# Altium PCB ArduinoUnoShield.PcbDoc
Units mm, origin at the board's own origin, x right, y up, seen from the top; angles counter-clockwise.
Board outline 68.58 x 53.34 mm, 2 copper layers (Top Layer, Bottom Layer); 22 components, 37 nets, 78 pads, 0 vias.
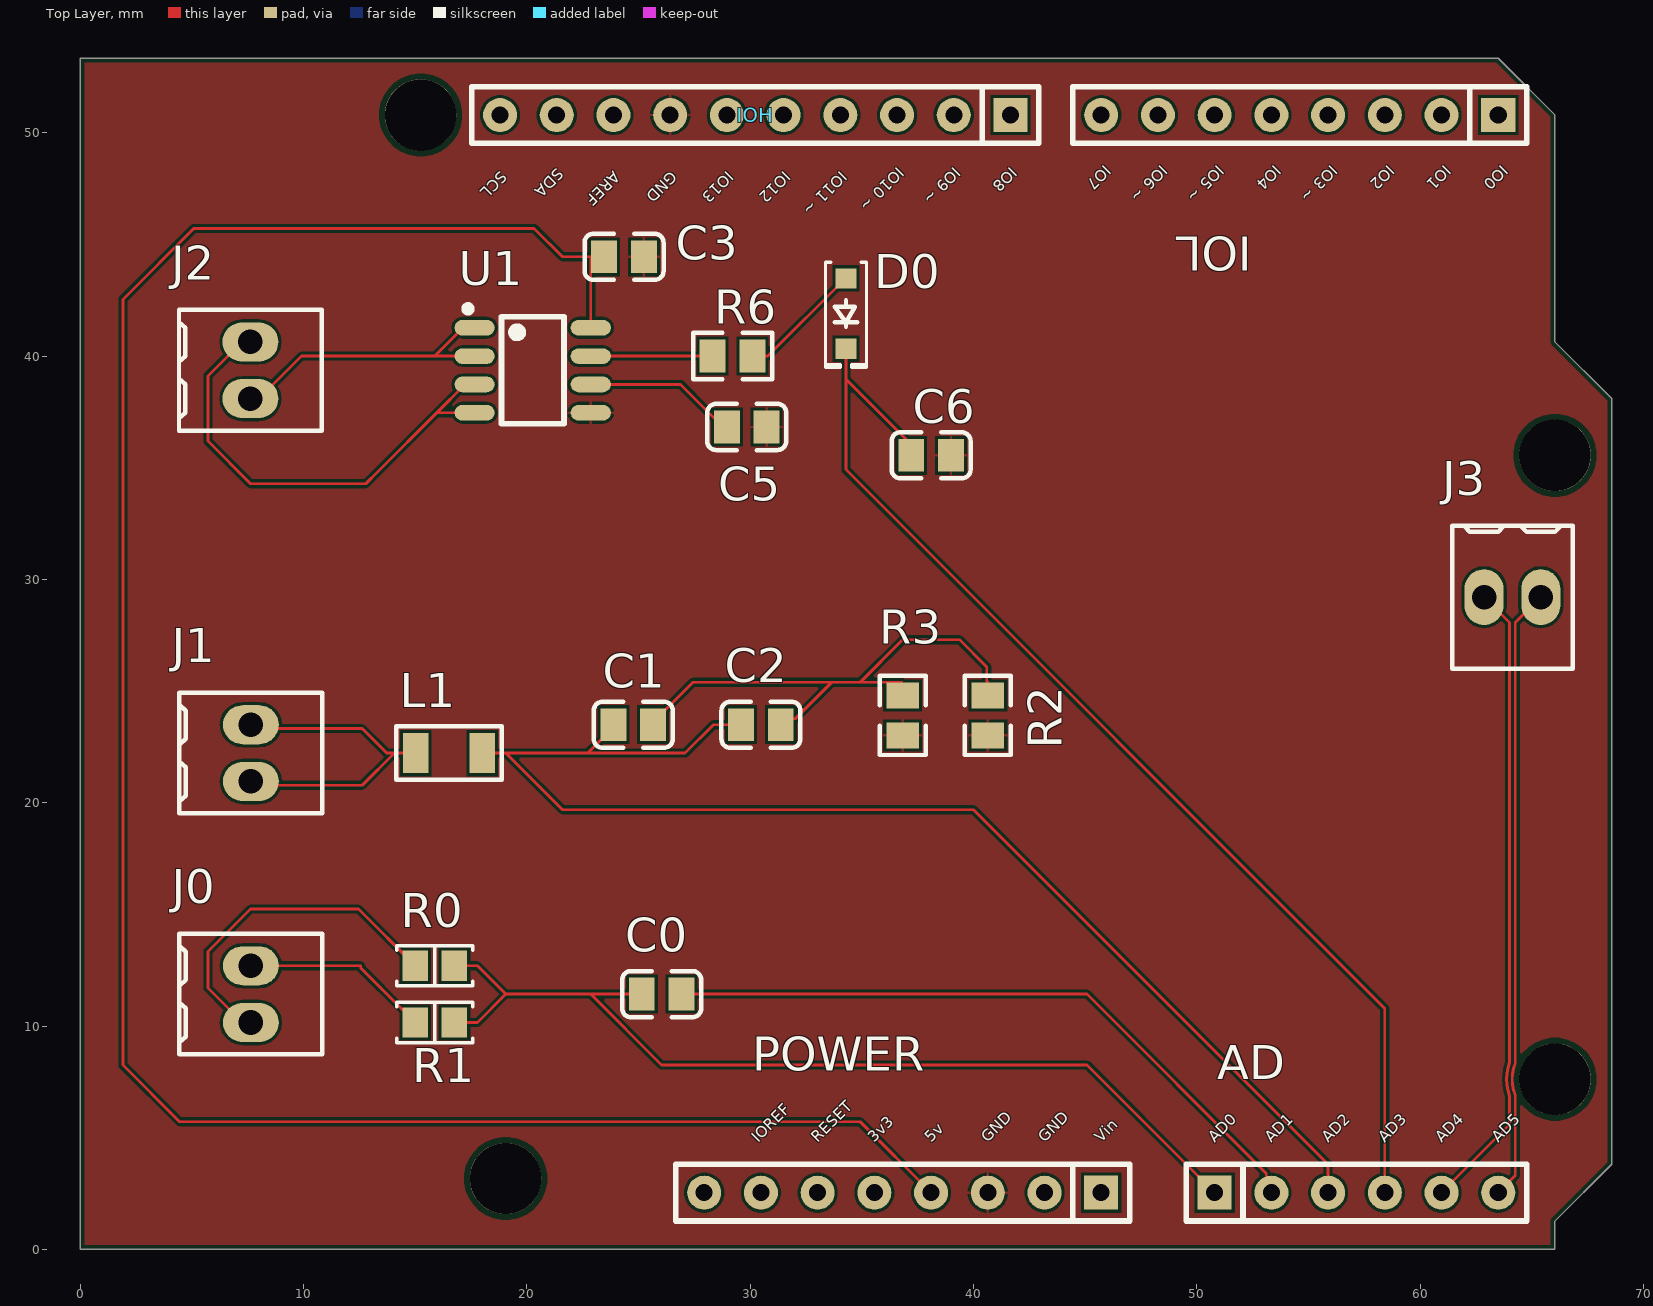
[diagram p0: Top Layer view]
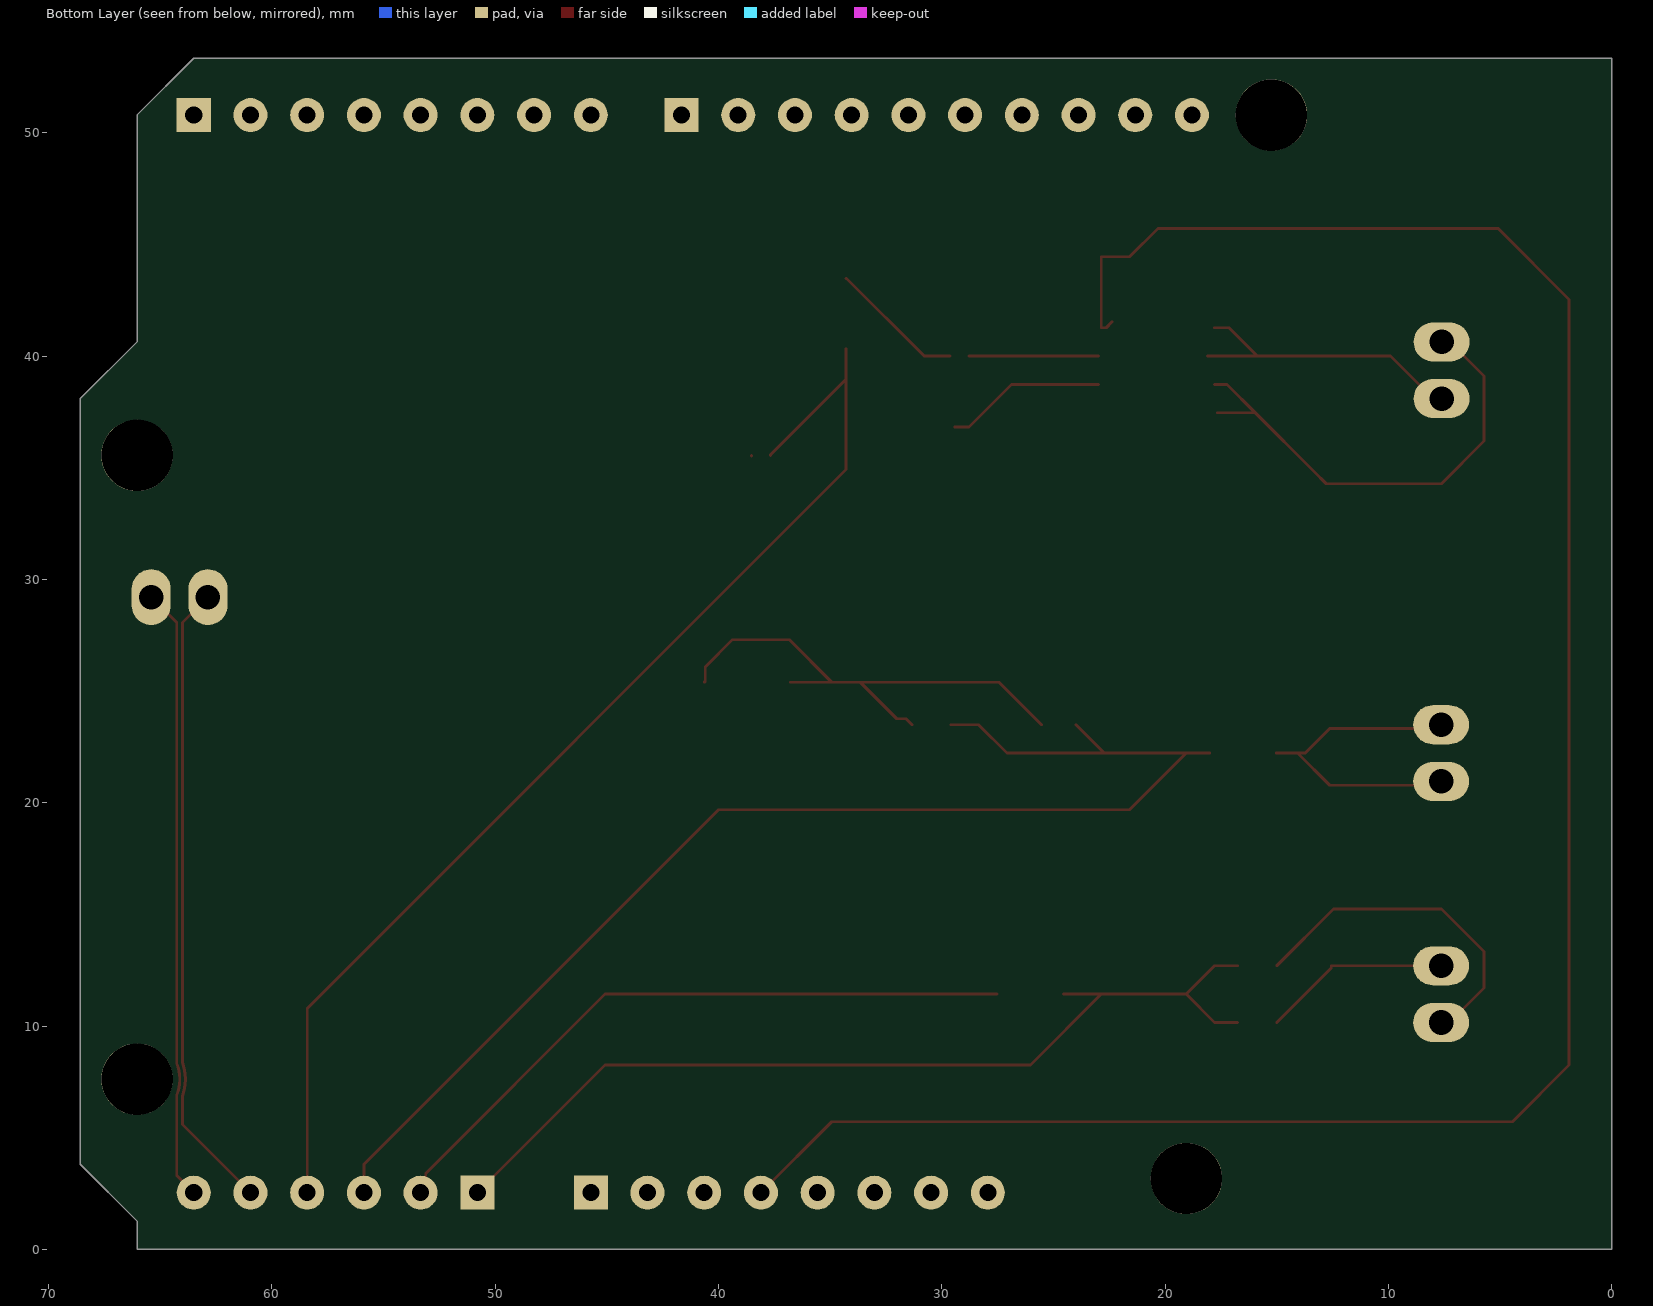
[diagram p1: Bottom Layer view, seen from below]
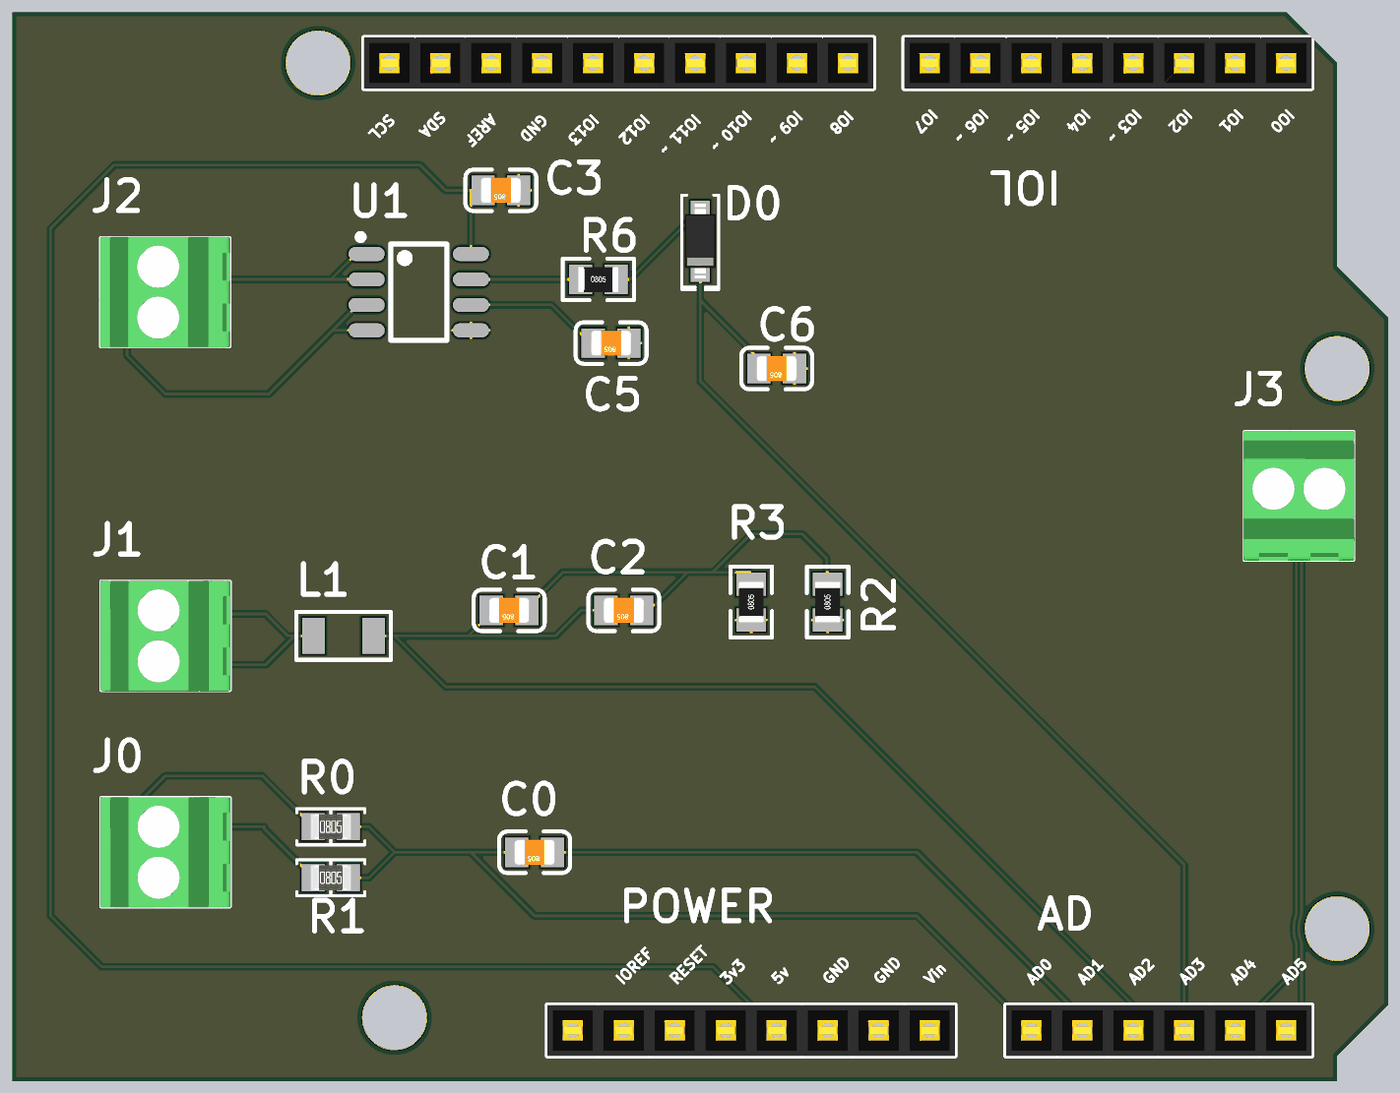
[diagram p2: 3D render of the assembled board from above, using the file's embedded part models]

## Layer stack, top to bottom
Top Solder: solder mask 0.0102, Solder Resist, Dk 3.5
Top Layer: signal copper 0.0356
Dielectric1: dielectric 0.32, FR-4, Dk 4.8
Bottom Layer: signal copper 0.0356
Bottom Solder: solder mask 0.0102, Solder Resist, Dk 3.5

## Board outline
0,0 0,53.34 63.5,53.34 66.04,50.8 66.04,40.64 68.58,38.1 68.58,3.81 66.04,1.27 66.04,0

## Design rules (kind name [scope] priority, off if disabled: settings)
BoardOutlineClearance [All] p1: gap=0.2 ignorepadtopadclearanceinfootprint=FALSE
Clearance [All] p1: gap=0.127 ignorepadtopadclearanceinfootprint=FALSE except(0.25: Arc-Hole Track-Hole SMDPad-Hole THPad-Hole Via-Hole Fill-Hole Poly-Hole Region-Hole Text-Hole)
ComponentClearance [All] p1: gap=0.127 collisioncheckmode=3 verticalgap=0.127 showdistances=TRUE
DiffPairsRouting [All] p1: maxlimit=0.254 minlimit=0.127 mostfreqgap=0.127 toplayer_minwidth=0.127 toplayer_maxwidth=25.4 toplayer_prefwidth=0.127 bottomlayer_minwidth=0.127 bottomlayer_maxwidth=25.4 bottomlayer_prefwidth=0.127 maxuncoupledlength=12.7
Height [All] p1: minheight=0 maxheight=1816.048 prefheight=12.7
HoleSize [All] p1: absolutevalues=TRUE maxlimit=6.3 minlimit=0.3 maxpercent=80.000 minpercent=20.000
HoleToHoleClearance [All] p1: gap=0.25 allowstackedmicrovias=FALSE
MinimumAnnularRing [All] p1: minimumring=0.076
MinimumSolderMaskSliver [All] p1: minsoldermaskwidth=0
PlaneClearance [All] p1: clearance=0.127
PlaneConnect PlaneConnectPowerPads [InPadClass('PowerPads')] p1: planeconnectstyle=Direct reliefexpansion=0.508 reliefentries=4 reliefconductorwidth=0.254 reliefairgap=0.254
PlaneConnect [All] p2: pad.planeconnectstyle=Relief pad.reliefexpansion=0.3 pad.reliefentries=4 pad.reliefconductorwidth=0.127 pad.reliefairgap=0.127 via.planeconnectstyle=Direct via.reliefexpansion=0.3 via.reliefentries=4 via.reliefconductorwidth=0.127 via.reliefairgap=0.127
PolygonConnect PolygonConnectPowerPads [All vs (InPadClass('PowerPads'))] p1: connectstyle=Direct reliefconductorwidth=0.254 reliefentries=4 polygonreliefangle="90 Angle" airgapwidth=0.254
PolygonConnect [All] p2: thpad.connectstyle=Relief thpad.reliefconductorwidth=0.127 thpad.reliefentries=4 thpad.polygonreliefangle="90 Angle" thpad.airgapwidth=0.127 smdpad.connectstyle=Relief smdpad.reliefconductorwidth=0.127 smdpad.reliefentries=4 smdpad.polygonreliefangle="90 Angle" smdpad.airgapwidth=0.127 via.connectstyle=Direct via.reliefconductorwidth=0.127 via.reliefentries=4 via.polygonreliefangle="90 Angle" via.airgapwidth=0.127
RoutingVias [All] p1: holewidth=0.3 width=0.6 viastyle="Through Hole" minholewidth=0.3 minwidth=0.6 maxholewidth=0.6 maxwidth=6.6
SilkToSilkClearance [All] p1: silktosilkclearance=0
SilkToSolderMaskClearance [IsPad] p1: minsilkscreentomaskgap=0.127 clearancetoexposedcopper=TRUE
SolderMaskExpansion [All] p1: expansion=0.075 istentingtop=FALSE
Width [All] p1: maxlimit=25.4 minlimit=0.127 preferedwidth=0.127 minimp=50.000000 maximp=50.000000 favimp=50.000000
20 further rules are at their usual default settings.

## Classes and differential pairs
differential pair CAN: +CAN_P -CAN_N

## Components (designator, comment, footprint, x,y, rotation, side; value= is the part's Value field where it differs from the comment)
AD "AD" "Header 6x1 8.5mm" 50.8,2.54 r0 top locked
C0 "4.7uF" 0805_C 26.035,11.43 r180 top
C1 "100nF" 0805_C 24.765,23.495 r180 top
C2 "4.7uF" 0805_C 30.48,23.495 r180 top
C3 "100nF" 0805_C 24.35,44.45 r180 top
C5 "1nF" 0805_C 29.845,36.83 r180 top
C6 "4.7uF" 0805_C 38.1,35.56 r180 top
D0 "1N4448W-7-F" SOD-123 34.29,41.91 r270 top
IOH "IOH" "Header 10x1 8.5mm" 41.656,50.8 r180 top locked
IOL "IOL" "Header 8x1 8.5mm" 63.5,50.8 r180 top locked
J0 "282834-2" "TE 282834-2" 7.639,11.43 r90 top
J1 "282834-2" "TE 282834-2" 7.639,22.225 r90 top
J2 "282834-2" "TE 282834-2" 7.62,39.37 r90 top
J3 "282834-2" "TE 282834-2" 64.135,29.21 r0 top
L1 "4.7uH  ±10%" 1206_L 16.51,22.225 r0 top
POWER "POWER_UNO" "Header 8x1 8.5mm" 45.72,2.54 r180 top locked
R0 "=Value" "RES 0805_2012" 15.875,12.7 r0 top
R1 "60.4 Ohms" "RES 0805_2012" 15.875,10.16 r0 top
R2 "100Ω ±1%" 0805_R 40.64,23.91 r90 top
R3 "10KΩ ±1%" 0805_R 36.83,23.91 r90 top
R6 "2KΩ ±1%" 0805_R 29.21,40.005 r0 top
U1 "ACS712ELCTR-20A-T" SOIC-8_150mil 20.26,39.37 r270 top

## Footprints (in the part's own frame and the unit in brackets; to place one, negate y for a bottom-side part, rotate by r counter-clockwise, add the part's x,y. Pads: shape width x height; smd on the part's side, far side on the other; paste and mask are expansions set on the pad)
0805_C [mm]
  rect 1.16x1.47 smd: 1(-0.89,0) 2(0.89,0)
  silkscreen extent -1.77,-1.04 1.77,1.04, body extent -1,-0.62 1,0.63, height 0.77
0805_R [mm]
  rect 1.16x1.47 smd: 1(-0.89,0) 2(0.89,0)
  silkscreen extent -1.77,-1.04 1.77,1.03, body extent -1,-0.62 1,0.63, height 0.49
1206_L [mm]
  rect 1.13x1.8 smd: 1(-1.49,0) 2(1.49,0)
  silkscreen extent -2.36,-1.2 2.35,1.2
"Header 6x1 8.5mm" [mil] "Stackable 6 pin header"
  rect 60x60 hole 30: 1(0,0)
  round 60 hole 30: 2(100,0) 3(200,0) 4(300,0) 5(400,0) 6(500,0)
  silkscreen extent -50,-50 550,50, body extent -50,-50 550,50, height 335
"Header 8x1 8.5mm" [mil] "Stackable 8 pin header"
  rect 60x60 hole 30: 1(0,0)
  round 60 hole 30: 2(100,0) 3(200,0) 4(300,0) 5(400,0) 6(500,0) 7(600,0) 8(700,0)
  silkscreen extent -50,-50 750,50, body extent -50,-50 750,50, height 335
"Header 10x1 8.5mm" [mil] "Stackable 10 pin header"
  rect 60x60 hole 30: 1(0,0)
  round 60 hole 30: 2(100,0) 3(200,0) 4(300,0) 5(400,0) 6(500,0) 7(600,0) 8(700,0) 9(800,0) 10(900,0)
  silkscreen extent -50,-50 950,50, body extent -50,-50 950,50, height 335
"RES 0805_2012" [mm] "Chip Resistor, 2-Leads, Body 2.00x1.25mm, IPC Medium Density"
  rect 1.15x1.35 smd: 1(-0.875,0) 2(0.875,0)
  silkscreen extent -1.7,-0.9 1.7,0.9, body extent -1,-0.62 1,0.63, height 0.6
SOD-123 [mm] "SOD, 2-Leads, Body 1.55x3.70mm, IPC Medium Density"
  rect 0.9x0.95 smd: 1(-1.575,0) 2(1.575,0)
  silkscreen extent -2.3,-0.92 2.41,0.92, body extent -1.86,-0.78 1.86,0.77, height 1.35
SOIC-8_150mil [mm]
  oval 0.7x1.8 smd: 1(-1.905,-2.6) 2(-0.635,-2.6) 3(0.635,-2.6) 4(1.905,-2.6) 5(1.905,2.6) 6(0.635,2.6) 7(-0.635,2.6) 8(-1.905,2.6)
  silkscreen extent -2.9,-3.05 2.4,1.4
"TE 282834-2" [mm]
  oval 1.75x2.5 hole 1.1: 1(-1.27,0) 2(1.27,0)
  silkscreen extent -2.7,-3.2 2.7,3.2, body extent -2.77,-3.25 2.77,3.25, height 10

## Part data
AD: Supplier Part Number 1=2699089, Supplier 1=Arrow, Supplier 2=Digi-Key, Supplier 3=Arrow, Supplier 4=Arrow, Supplier Part Number 2=SAM1198-06-ND, Supplier Part Number 3=2699088, Supplier Part Number 4=2699075
C0 C2 C6: library part "0805 4.7uF (475) 10% 25V", "Chip capacitors", Manufacturer="Samsung Electro-Mechanics", Package=0805, PartNumber=CL21A475KAQNNNE, SuppliersPartNumber=C1779, Tolerance=10%, Voltage=25V, Capacitance=4.7uF, ComponentLink1Description="Supplier link", ComponentLink1URL=http://www.szlcsc.com/product/details_2131.html, Supplier=LC
C1 C3: library part "0805 100nF(104) 10% 50V", "Chip capacitors", Manufacturer=YAGEO, Package=0805, PartNumber=CC0805KRX7R9BB104, SuppliersPartNumber=C49678, Tolerance=10%, Voltage=50V, Capacitance=100nF, ComponentLink1Description="Supplier link", ComponentLink1URL=http://www.szlcsc.com/product/details_50686.html, Supplier=LC
C5: library part "0805 1nF (102) 10% 50V", "Chip capacitors", Manufacturer="Samsung Electro-Mechanics", Package=0805, PartNumber=CL21B102KBCNNNC, SuppliersPartNumber=C46653, Tolerance=10%, Voltage=50V, Capacitance=1nF, ComponentLink1Description="Supplier link", ComponentLink1URL=http://www.szlcsc.com/product/details_52223.html, Supplier=LC
D0: "DIODE GEN PURP 75V 250MA SOD123", Current - Average Rectified (Io)=250mA, Current - Reverse Leakage @ Vr="2.5µA @ 75V", Manufacturer="Diodes Incorporated", Operating Temperature - Junction="-65°C ~ 150°C", Package / Case=SOD-123, Supplier Part Number 1=1N4448W-FDICT-ND, Voltage - DC Reverse (Vr) (Max)=75V, Voltage - Forward (Vf) (Max) @ If="1.25V @ 150mA", ComponentLink1Description=Datasheet, ComponentLink1URL=https://www.diodes.com/assets/Datasheets/ds12002.pdf, ComponentLink2Description="DigiKey Link", ComponentLink2URL=http://digikey.com/product-detail/en/diodes-incorporated/1N4448W-7-F/1N4448W-FDICT-ND/717799, Diode Type=Standard, LastUpdated="2020-09-02 1:19:08 AM", Lifecycle Status=Active, Minimum Order=1, Mounting Type="Surface Mount", Packaging=TapeAndReel, Part Number=1N4448W-7-F, Part Status=Active, PartId=1003, Price=0.03, Reverse Recovery Time (trr)=4ns, Series=-, Speed="Fast Recovery =< 500ns, > 200mA (Io)", Supplier 1=DigiKey, Supplier Device Package=SOD-123
IOH: Supplier Part Number 1=2698803S4475693N1004, Supplier 1=Arrow, Supplier 2=Digi-Key, Supplier 3=Arrow, Supplier Part Number 2=SAM1198-10-ND, Supplier Part Number 3=2698789
IOL POWER: Supplier Part Number 1=SAM1198-08-ND, Supplier 1=Digi-Key, Supplier 2=Arrow, Supplier 3=Arrow, Supplier 4=Arrow, Supplier Part Number 2=2698939, Supplier Part Number 3=2698940, Supplier Part Number 4=2698925
J0 J1 J2 J3: "TERM BLK 2P SIDE ENT 2.54MM PCB", Color=Green, Current=10A, Manufacturer="TE Connectivity AMP Connectors", Supplier Part Number 1=A98333-ND, Voltage=150V, ComponentLink1Description=Datasheet, ComponentLink1URL=https://www.te.com/commerce/DocumentDelivery/DDEController?Action=srchrtrv&DocNm=282834&DocType=Customer+Drawing&DocLang=English, ComponentLink2Description="DigiKey Link", ComponentLink2URL=http://digikey.com/product-detail/en/te-connectivity-amp-connectors/282834-2/A98333-ND/1150135, LastUpdated="2020-01-15 4:15:38 AM", Lifecycle Status=Active, Mating Orientation="Horizontal with Board", Minimum Order=1, Mounting Type="Through Hole", Number of Levels=1, Packaging=Bulk, Part Number=282834-2, Part Status=Active, Pitch="0.100\" (2.54mm)", Positions Per Level=2, Price=0.88, Series=Buchanan, Supplier 1=DigiKey, Wire Gauge="16-30 AWG", Wire Termination="Screw - Rising Cage Clamp"
L1: library part "1206 4.7uH  10%", "贴片电感", Package=1206, SuppliersPartNumber=C1049, ComponentLink1Description=供应商链接, ComponentLink1URL=http://www.szlcsc.com/product/details_1401.html, Supplier=LC
R0: library part RN73C2A60R4BTDF, "RES SMD 60.4 OHM 0.1% 1/10W 0805", Device Package="0805 (2012 Metric)", Manufacturer="TE Connectivity Passive Product", Operating Temperature="-55°C ~ 155°C", Power (Watts)="0.1W, 1/10W", Resistance="60.4 Ohms", Supplier Device Package=0805, Supplier Part Number 1=A103481CT-ND, Temperature Coefficient=±10ppm/°C, Tolerance=±0.1%, ComponentLink1Description=Datasheet, ComponentLink1URL=https://www.te.com/commerce/DocumentDelivery/DDEController?Action=srchrtrv&DocNm=1773270&DocType=DS&DocLang=English, ComponentLink2Description="DigiKey Link", ComponentLink2URL=http://digikey.com/product-detail/en/te-connectivity-passive-product/RN73C2A60R4BTDF/A103481CT-ND/2730697, Composition="Thin Film", Height - Seated (Max)="0.026\" (0.65mm)", LastUpdated="2020-09-02 1:15:15 AM", Lifecycle Status=Active, Minimum Order=1, Number of Terminations=2, Package / Case="0805 (2012 Metric)", Packaging=TapeAndReel, Part Number=RN73C2A60R4BTDF, Part Status=Active, PartId=32070, Price=0.37, R1="60.4 Ohms", Series="RN73, Holsworthy", Size / Dimension="0.079\" L x 0.049\" W (2.00mm x 1.25mm)", Supplier 1=DigiKey
R1: library part RN73C2A60R4BTDF, "RES SMD 60.4 OHM 0.1% 1/10W 0805", Device Package="0805 (2012 Metric)", Manufacturer="TE Connectivity Passive Product", Operating Temperature="-55°C ~ 155°C", Power (Watts)="0.1W, 1/10W", Supplier Device Package=0805, Supplier Part Number 1=A103481CT-ND, Temperature Coefficient=±10ppm/°C, Tolerance=±0.1%, ComponentLink1Description=Datasheet, ComponentLink1URL=https://www.te.com/commerce/DocumentDelivery/DDEController?Action=srchrtrv&DocNm=1773270&DocType=DS&DocLang=English, ComponentLink2Description="DigiKey Link", ComponentLink2URL=http://digikey.com/product-detail/en/te-connectivity-passive-product/RN73C2A60R4BTDF/A103481CT-ND/2730697, Composition="Thin Film", Height - Seated (Max)="0.026\" (0.65mm)", LastUpdated="2020-09-02 1:15:15 AM", Lifecycle Status=Active, Minimum Order=1, Number of Terminations=2, Package / Case="0805 (2012 Metric)", Packaging=TapeAndReel, Part Number=RN73C2A60R4BTDF, Part Status=Active, PartId=32070, Price=0.37, Resistance="60.4 Ohms", Series="RN73, Holsworthy", Size / Dimension="0.079\" L x 0.049\" W (2.00mm x 1.25mm)", Supplier 1=DigiKey
R2: library part "0805 100R (1000) 1%", "Chip resistor", Manufacturer="Uniroyal Elec", Package=0805, Power=1/8W, SuppliersPartNumber=C17408, Tolerance=1%, ComponentLink1Description="Supplier link", ComponentLink1URL=http://www.szlcsc.com/product/details_18096.html, Supplier=LC
R3: library part "0805 10K (1002) 1%", "Chip resistor", Manufacturer="Uniroyal Elec", Package=0805, PartNumber=0805W8F1002T5E, Power=1/8W, Resistance=10KΩ, SuppliersPartNumber=C17414, Tolerance=1%, ComponentLink1Description="Supplier link", ComponentLink1URL=http://www.szlcsc.com/product/details_18102.html, Supplier=LC
R6: library part "0805 2K (2001) 1%", "Chip resistor", Manufacturer="Uniroyal Elec", Package=0805, Power=1/8W, SuppliersPartNumber=C17604, Tolerance=1%, ComponentLink1Description="Supplier link", ComponentLink1URL=http://www.szlcsc.com/product/details_18292.html, Supplier=LC
U1: library part ACS712ELCTR-20A-T_[C10681], "传感器", Package=SOIC-8_150mil, SuppliersPartNumber=C10681, ComponentLink1Description=供应商链接, ComponentLink1URL=http://www.szlcsc.com/product/details_11225.html, Supplier=LC

## Free pads (board coordinates)
  round 3.2 hole 3.2: 0(15.24,50.8) 0(19.05,3.175) 0(66.04,7.62) 0(66.04,35.56)

## Nets (pads, with @x,y where several pads share a name; then routed paths per layer and width w, separated by ;. In a path a pad name is that pad's centre, name@x,y a point inside that pad or via, vN(x,y) a via of type N, cw(c..) or ccw(c..) an arc to the next point about the centre after c; other vN are vias at no path point)
AD0: AD.1 C0.2 R0.2 R1.2 | length 42.8
  Top Layer w0.127: R1.2 17.78,10.16 19.05,11.43 ; R0.2 17.78,12.7 19.05,11.43 ; 24.545,11.43 22.86,11.43 ; AD.1 45.085,8.255 26.035,8.255 22.86,11.43 ; 19.05,11.43 19.685,11.43 22.86,11.43
AD1: AD.2 C0.1 | length 31.7
  Top Layer w0.127: 27.525,11.43 45.085,11.43 53.111,3.404 AD.2@53.111,3.185 ; AD.2 AD.2@53.34,2.956 ; AD.2@53.657,2.787 53.657,2.857 53.439,2.857 AD.2@53.34,2.956 ; AD.2@53.985,2.459 53.985,2.53 53.693,2.822 AD.2@53.34,3.175 ; AD.2@53.111,3.185 53.121,3.175 AD.2@53.34,3.175 ; AD.2@53.111,3.185 AD.2@53.34,2.956 ; AD.2@53.34,2.956 AD.2@53.34,3.175
AREF: IOH.8
CAN_N: AD.5 J3.1 | length 28.4
  Top Layer w0.127: AD.5 64.008,5.588 64.008,6.866 cw(c66.04,7.62) 64.008,8.374 64.008,28.067 J3.1
CAN_P: AD.6 J3.2 | length 27.5
  Top Layer w0.127: AD.6 64.262,3.302 64.262,6.913 cw(c66.04,7.62) 64.262,8.327 64.262,28.067 J3.2
GND: C3.1 C5.1 C6.1 IOH.7 POWER.3 R2.1 R3.1 U1.5 | length 0
  Top Layer w0.127: C6.1@38.525,35.535 C6.1@38.525,35.56
IO0: IOL.1
IO1: IOL.2
IO2: IOL.3
IO3: IOL.4
IO4: IOL.5
IO5: IOL.6
IO6: IOL.7
IO7: IOL.8
IO8: IOH.1
IO9: IOH.2
IO10: IOH.3
IO11: IOH.4
IO12: IOH.5
IO13: IOH.6
IOREF: POWER.7
NetAD_3: AD.3 C1.2 C2.2 L1.2 | length 59.6
  Top Layer w0.127: L1.2 19.05,22.225 ; C1.2@23.995,23.495 22.725,22.225 ; C2.2 28.355,23.495 27.085,22.225 22.725,22.225 ; AD.3 55.88,3.81 40.005,19.685 21.59,19.685 19.05,22.225 ; 19.05,22.225 22.725,22.225
NetAD_4: AD.4 C6.2 D0.2 | length 52.6
  Top Layer w0.127: D0.2 34.29,38.97 ; C6.2@37.675,35.56 37.675,35.585 34.29,38.97 ; AD.4 58.42,10.795 34.29,34.925 34.29,38.97
NetC1_1: C1.1 C2.1 R2.2 R3.2 | length 22.8
  Top Layer w0.127: C1.1@25.535,23.495 27.44,25.4 33.655,25.4 ; C2.1@31.335,23.495 31.601,23.761 32.016,23.761 33.655,25.4 ; 36.77,25.4 34.925,25.4 ; 40.64,25.4 40.594,25.446 40.594,26.081 39.37,27.305 36.83,27.305 34.925,25.4 ; 33.655,25.4 34.925,25.4
NetC5_2: C5.2 U1.6 | length 7.2
  Top Layer w0.127: U1.6@22.98,38.735 26.88,38.735 28.785,36.83 C5.2@29.42,36.83
NetD0_1: D0.1 R6.2 | length 6.1
  Top Layer w0.127: R6.2@29.635,40.005 30.785,40.005 34.265,43.485 D0.1
NetJ0_1: J0.1 R0.1 | length 15.3
  Top Layer w0.127: J0.1 7.264,10.16 5.715,11.709 5.715,13.335 7.62,15.24 12.46,15.24 R0.1
NetJ0_2: J0.2 R1.1 | length 8.5
  Top Layer w0.127: J0.2 12.56,12.7 12.56,12.6 R1.1
NetJ1_1: J1.1 J1.2 L1.1 | length 16.2
  Top Layer w0.127: J1.1@6.985,20.782 12.626,20.782 14.068,22.225 ; J1.2@6.985,23.322 12.626,23.322 13.723,22.225 14.068,22.225 ; L1.1 14.068,22.225
NetJ2_1: J2.1 U1.1 U1.2 | length 13.7
  Top Layer w0.127: J2.1 7.995,38.1 9.9,40.005 15.875,40.005 ; U1.1@17.78,41.275 17.145,41.275 15.875,40.005 ; U1.2@18.107,40.005 U1.2 15.875,40.005
NetJ2_2: J2.2 U1.3 U1.4 | length 21.8
  Top Layer w0.127: J2.2 7.245,40.64 5.715,39.11 5.715,36.195 7.62,34.29 12.785,34.29 13.335,34.84 15.96,37.465 ; U1.4 15.96,37.465 ; U1.3@17.78,38.735 17.23,38.735 15.96,37.465
NetR6_1: R6.1 U1.7 | length 5.8
  Top Layer w0.127: U1.7@22.98,40.005 R6.1@28.785,40.005
RESET: POWER.6
SCL: IOH.10
SDA: IOH.9
VCC5V: C3.2 POWER.4 U1.8 | length 99.4
  Top Layer w0.127: U1.8@22.374,41.54 22.638,41.275 U1.8 22.86,44.45 21.59,44.45 20.32,45.72 5.08,45.72 1.905,42.545 1.905,8.255 4.445,5.715 34.925,5.715 POWER.4
VIN: POWER.1
pads on no net: POWER.2 POWER.5 POWER.8

## Polygon pours and split planes (outlines as drawn)
GND on Top Layer "GND_L01_P000" (solid, pour order 0): 0,0 0,53.34 63.5,53.34 66.04,50.8 66.04,40.64 68.58,38.1 68.58,3.81 66.04,1.27 66.04,0

## Silkscreen, mask and mechanical layers (free items; w line width, h text height)
Top Overlay:
  text "IO7" at 45.847,48.588 h0.51 r225
  text "IO6 ~" at 48.387,48.588 h0.51 r225
  text "IO5 ~" at 50.927,48.588 h0.51 r225
  text "IO4" at 53.467,48.588 h0.51 r225
  text "IO3 ~" at 56.007,48.588 h0.51 r225
  text "IO2" at 58.547,48.588 h0.51 r225
  text "IO1" at 61.087,48.588 h0.51 r225
  text "IO0" at 63.627,48.588 h0.51 r225
  text "IO10 ~" at 36.576,48.514 h0.51 r225
  text "IO9 ~" at 39.116,48.514 h0.51 r225
  text "IO8" at 41.656,48.514 h0.51 r225
  text "SDA" at 21.336,48.461 h0.51 r225
  text "SCL" at 18.796,48.334 h0.51 r225
  text "AREF" at 23.876,48.334 h0.51 r225
  text "GND" at 26.416,48.334 h0.51 r225
  text "IO13" at 28.956,48.334 h0.51 r225
  text "IO12" at 31.496,48.334 h0.51 r225
  text "IO11 ~" at 34.036,48.334 h0.51 r225
  text "IOREF" at 30.353,4.752 h0.51 r45
  text "RESET" at 33.02,4.752 h0.51 r45
  text "3v3" at 35.56,4.752 h0.51 r45
  text "5v" at 38.1,4.752 h0.51 r45
  text "GND" at 40.64,4.752 h0.51 r45
  text "GND" at 43.18,4.752 h0.51 r45
  text "Vin" at 45.72,4.752 h0.51 r45
  text "AD0" at 50.8,4.752 h0.51 r45
  text "AD1" at 53.34,4.752 h0.51 r45
  text "AD2" at 55.88,4.752 h0.51 r45
  text "AD3" at 58.42,4.752 h0.51 r45
  text "AD4" at 60.96,4.752 h0.51 r45
  text "AD5" at 63.5,4.752 h0.51 r45
Mechanical 1:
  circle w0.127: c15.24,50.8 r1.6
  circle w0.127: c66.04,7.62 r1.6
  circle w0.127: c19.05,3.175 r1.6
  circle w0.127: c66.04,35.56 r1.6
  lines w0.127: 0,0 0,53.34 63.5,53.34 66.04,50.8 66.04,40.64 68.58,38.1 68.58,3.81 66.04,1.27 66.04,0 0,0